# Altium PCB PCB1.PcbDoc (part 1 of 2)
Units mil, origin at the board's own origin, x right, y up, seen from the top; angles counter-clockwise.
Board outline 8251 x 7030 mil, 4 copper layers (Top Layer, Mid-Layer 1, Mid-Layer 2, Bottom Layer); 230 components, 122 nets, 652 pads, 23 vias.
Unrouted connection lines stored in the file: 312.
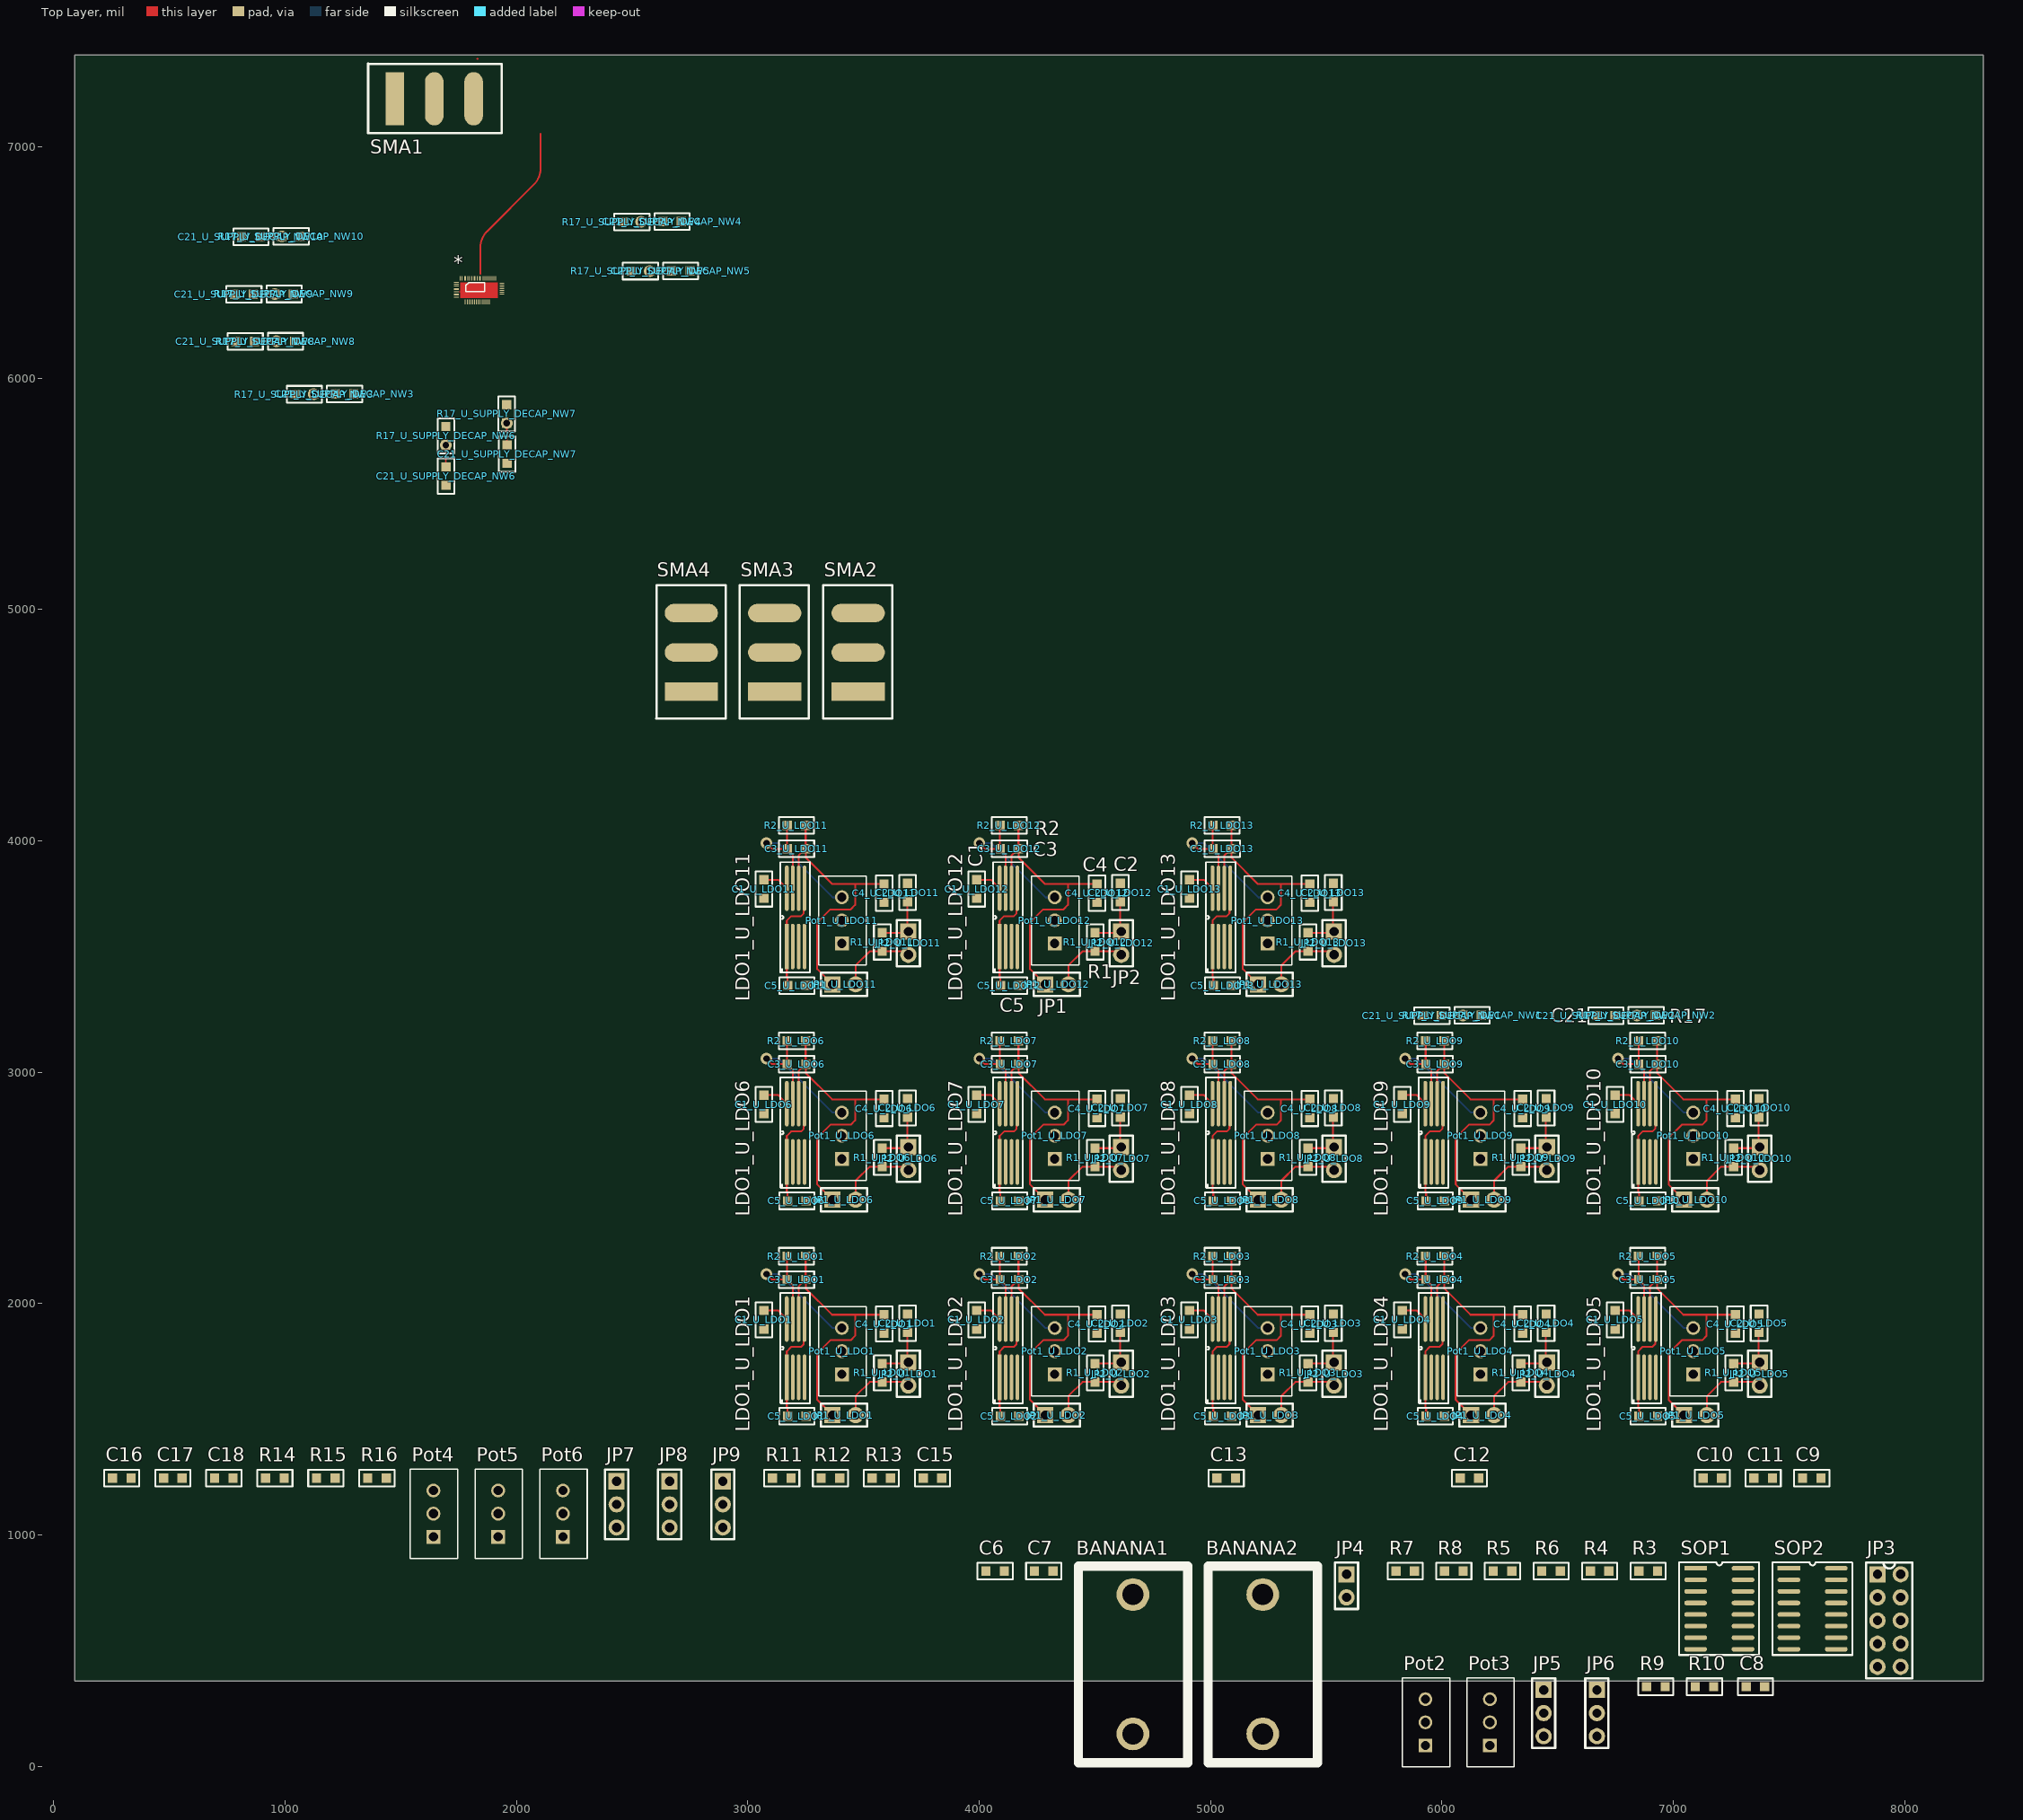
[diagram p0: Top Layer view]
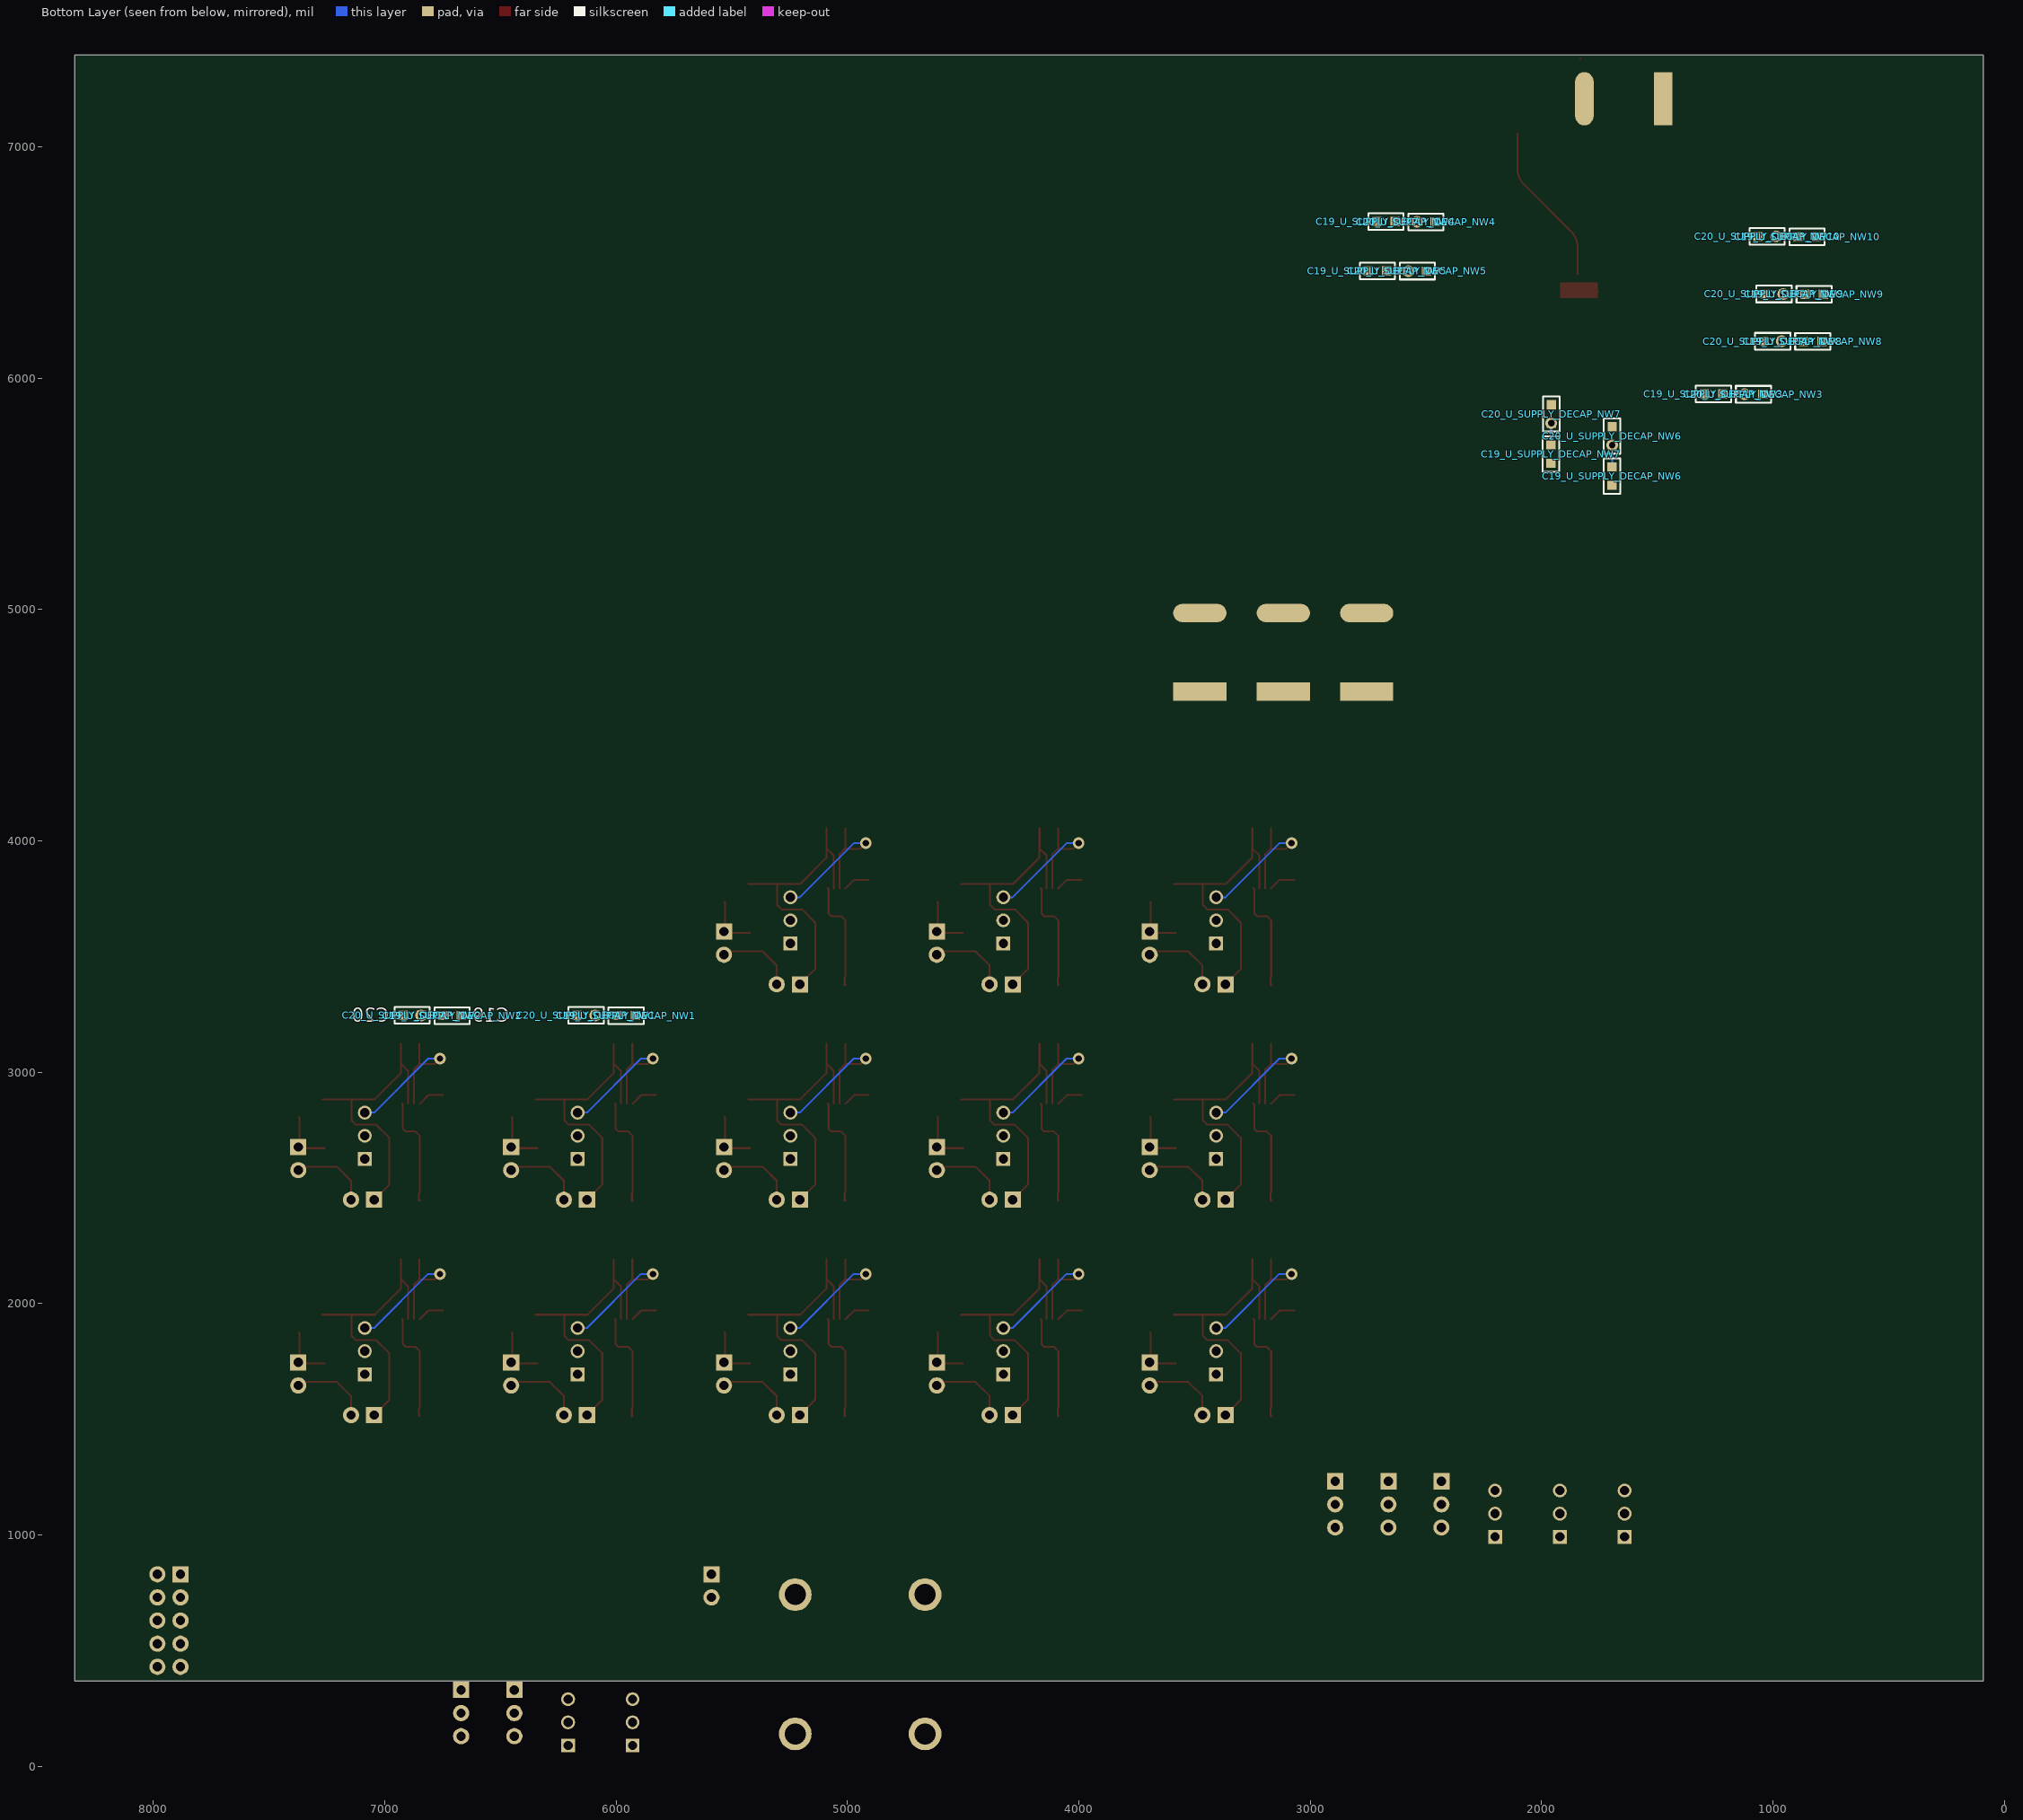
[diagram p1: Bottom Layer view, seen from below]

## Layer stack, top to bottom
Top Solder: solder mask 0.4, Solder Resist, Dk 3.5
Top Layer: signal copper 1.4
Dielectric 1: dielectric 12.6, FR-4, Dk 4.8
Mid-Layer 1: signal copper 1.4
Dielectric2: dielectric 12.6, FR-4, Dk 4.8
Mid-Layer 2: signal copper 1.4
Dielectric3: dielectric 12.6, FR-4, Dk 4.8
Bottom Layer: signal copper 1.4
Bottom Solder: solder mask 0.4, Solder Resist, Dk 3.5

## Board outline
90,368 8341,368 8341,7398 90,7398

## Design rules (kind name [scope] priority, off if disabled: settings)
Clearance "Stitching GND" [IsStitchingVia and InNet('GND') vs (IsVia and (Not IsStitchingVia)) Or IsPad] p1: gap=40
Clearance Clearance_CPWG_single [(InNet('INCLK') OR InNet('PLL_CLK_OUT') OR InNet('PLL_CLK_OUTB')) vs InPolygon] p2: gap=6
Clearance [All] p3: gap=4
DiffPairsRouting [InNet('TXP') OR InNet('TXN')] p1: maxlimit=10 minlimit=10 mostfreqgap=10 toplayer_minwidth=15 toplayer_maxwidth=15 toplayer_prefwidth=15 midlayer1_minwidth=15 midlayer1_maxwidth=15 midlayer1_prefwidth=15 midlayer2_minwidth=15 midlayer2_maxwidth=15 midlayer2_prefwidth=15 bottomlayer_minwidth=15 bottomlayer_maxwidth=15 bottomlayer_prefwidth=15 maxuncoupledlength=500
HoleSize [All] p1: absolutevalues=TRUE maxlimit=250 minlimit=10 maxpercent=80.000 minpercent=20.000
MatchedLengths MatchedLengths_1 [InNet('RXP') OR InNet('RXN')] p1: tolerance=10 checknetsindiffpair=FALSE checkdiffpairvsdiffpair=TRUE checkothers=TRUE
MatchedLengths [InNet('TXP') OR InNet('TXN')] p2: tolerance=1 checknetsindiffpair=FALSE checkdiffpairvsdiffpair=TRUE checkothers=TRUE
PolygonConnect PolygonConnect_GND [All] p1: connectstyle=Direct reliefconductorwidth=10 reliefentries=4 polygonreliefangle="90 Angle" airgapwidth=10
PolygonConnect [All] p2: connectstyle=Relief reliefconductorwidth=10 reliefentries=4 polygonreliefangle="90 Angle" airgapwidth=10
RoomDefinition U_SUPPLY_DECAP_NW10 [InComponentClass('U_SUPPLY_DECAP_NW10')] p1: confinementstyle=ConfineIn formatcopy=TRUE lockcomponents=FALSE outline 575,6550 1327,6550 1327,6681 575,6681
RoomDefinition U_SUPPLY_DECAP_NW9 [InComponentClass('U_SUPPLY_DECAP_NW9')] p2: confinementstyle=ConfineIn formatcopy=TRUE lockcomponents=FALSE outline 545,6301 1297,6301 1297,6432 545,6432
RoomDefinition U_SUPPLY_DECAP_NW8 [InComponentClass('U_SUPPLY_DECAP_NW8')] p3: confinementstyle=ConfineIn formatcopy=TRUE lockcomponents=FALSE outline 551,6097 1303,6097 1303,6228 551,6228
RoomDefinition U_SUPPLY_DECAP_NW7 [InComponentClass('U_SUPPLY_DECAP_NW7')] p4: confinementstyle=ConfineIn formatcopy=TRUE lockcomponents=FALSE outline 2021,5395 2021,6147 1890,6147 1890,5395
RoomDefinition U_SUPPLY_DECAP_NW6 [InComponentClass('U_SUPPLY_DECAP_NW6')] p5: confinementstyle=ConfineIn formatcopy=TRUE lockcomponents=FALSE outline 1758,5300 1758,6052 1627,6052 1627,5300
RoomDefinition U_SUPPLY_DECAP_NW5 [InComponentClass('U_SUPPLY_DECAP_NW5')] p6: confinementstyle=ConfineIn formatcopy=TRUE lockcomponents=FALSE outline 2987,6526 2235,6526 2235,6395 2987,6395
RoomDefinition U_SUPPLY_DECAP_NW4 [InComponentClass('U_SUPPLY_DECAP_NW4')] p7: confinementstyle=ConfineIn formatcopy=TRUE lockcomponents=FALSE outline 2950,6739 2198,6739 2198,6608 2950,6608
RoomDefinition U_SUPPLY_DECAP_NW3 [InComponentClass('U_SUPPLY_DECAP_NW3')] p8: confinementstyle=ConfineIn formatcopy=TRUE lockcomponents=FALSE outline 1534,5994 782,5994 782,5863 1534,5863
RoomDefinition U_SUPPLY_DECAP_NW2 [InComponentClass('U_SUPPLY_DECAP_NW2')] p9: confinementstyle=ConfineIn formatcopy=TRUE lockcomponents=FALSE outline 6432,3183 7184,3183 7184,3314 6432,3314
RoomDefinition U_SUPPLY_DECAP_NW1 [InComponentClass('U_SUPPLY_DECAP_NW1')] p10: confinementstyle=ConfineIn formatcopy=TRUE lockcomponents=FALSE outline 5680,3183 6432,3183 6432,3314 5680,3314
RoomDefinition U_LDO13 [InComponentClass('U_LDO13')] p11: confinementstyle=ConfineIn formatcopy=TRUE lockcomponents=FALSE outline 4760,3183 5680,3183 5680,4114 4760,4114
RoomDefinition U_LDO12 [InComponentClass('U_LDO12')] p12: confinementstyle=ConfineIn formatcopy=TRUE lockcomponents=FALSE outline 3840,3183 4760,3183 4760,4114 3840,4114
RoomDefinition U_LDO11 [InComponentClass('U_LDO11')] p13: confinementstyle=ConfineIn formatcopy=TRUE lockcomponents=FALSE outline 2920,3183 3840,3183 3840,4114 2920,4114
RoomDefinition U_LDO10 [InComponentClass('U_LDO10')] p14: confinementstyle=ConfineIn formatcopy=TRUE lockcomponents=FALSE outline 6600,2252 7520,2252 7520,3183 6600,3183
RoomDefinition U_LDO9 [InComponentClass('U_LDO9')] p15: confinementstyle=ConfineIn formatcopy=TRUE lockcomponents=FALSE outline 5680,2252 6600,2252 6600,3183 5680,3183
RoomDefinition U_LDO8 [InComponentClass('U_LDO8')] p16: confinementstyle=ConfineIn formatcopy=TRUE lockcomponents=FALSE outline 4760,2252 5680,2252 5680,3183 4760,3183
RoomDefinition U_LDO7 [InComponentClass('U_LDO7')] p17: confinementstyle=ConfineIn formatcopy=TRUE lockcomponents=FALSE outline 3840,2252 4760,2252 4760,3183 3840,3183
RoomDefinition U_LDO6 [InComponentClass('U_LDO6')] p18: confinementstyle=ConfineIn formatcopy=TRUE lockcomponents=FALSE outline 2920,2252 3840,2252 3840,3183 2920,3183
RoomDefinition U_LDO5 [InComponentClass('U_LDO5')] p19: confinementstyle=ConfineIn formatcopy=TRUE lockcomponents=FALSE outline 6600,1321 7520,1321 7520,2252 6600,2252
RoomDefinition U_LDO4 [InComponentClass('U_LDO4')] p20: confinementstyle=ConfineIn formatcopy=TRUE lockcomponents=FALSE outline 5680,1321 6600,1321 6600,2252 5680,2252
RoomDefinition U_LDO3 [InComponentClass('U_LDO3')] p21: confinementstyle=ConfineIn formatcopy=TRUE lockcomponents=FALSE outline 4760,1321 5680,1321 5680,2252 4760,2252
RoomDefinition U_LDO2 [InComponentClass('U_LDO2')] p22: confinementstyle=ConfineIn formatcopy=TRUE lockcomponents=FALSE outline 3840,1321 4760,1321 4760,2252 3840,2252
RoomDefinition U_LDO1 [InComponentClass('U_LDO1')] p23: confinementstyle=ConfineIn formatcopy=TRUE lockcomponents=FALSE outline 2920,1321 3840,1321 3840,2252 2920,2252
RoutingVias [All] p1: holewidth=28 width=50 viastyle="Through Hole" minholewidth=10 minwidth=15 maxholewidth=250 maxwidth=250
SolderMaskExpansion "Schematic Solder Mask Expansion_13" [InComponent('Pot3')] p1: expansion=5
SolderMaskExpansion "Schematic Solder Mask Expansion_10" [InComponent('R10')] p2: expansion=5
SolderMaskExpansion "Schematic Solder Mask Expansion_7" [InComponent('SMA1')] p3: expansion=5
SolderMaskExpansion "Schematic Solder Mask Expansion_4" [InComponent('SMA2')] p4: expansion=5
SolderMaskExpansion "Schematic Solder Mask Expansion_1" [InComponent('SMA3')] p5: expansion=5
SolderMaskExpansion "Schematic Solder Mask Expansion" [InComponent('SMA4')] p6: expansion=5
SolderMaskExpansion "Schematic Solder Mask Expansion_307" [InComponent('C1_U_LDO5')] p7: expansion=5
SolderMaskExpansion "Schematic Solder Mask Expansion_306" [InComponent('C1_U_LDO4')] p8: expansion=5
SolderMaskExpansion "Schematic Solder Mask Expansion_305" [InComponent('C1_U_LDO1')] p9: expansion=5
SolderMaskExpansion "Schematic Solder Mask Expansion_304" [InComponent('C1_U_LDO3')] p10: expansion=5
SolderMaskExpansion "Schematic Solder Mask Expansion_303" [InComponent('C1_U_LDO2')] p11: expansion=5
SolderMaskExpansion "Schematic Solder Mask Expansion_302" [InComponent('BANANA2')] p12: expansion=5
SolderMaskExpansion "Schematic Solder Mask Expansion_301" [InComponent('BANANA1')] p13: expansion=5
SolderMaskExpansion "Schematic Solder Mask Expansion_300" [InComponent('C20_U_SUPPLY_DECAP_NW9')] p14: expansion=5
SolderMaskExpansion "Schematic Solder Mask Expansion_299" [InComponent('C1_U_LDO6')] p15: expansion=5
SolderMaskExpansion "Schematic Solder Mask Expansion_298" [InComponent('C1_U_LDO7')] p16: expansion=5
SolderMaskExpansion "Schematic Solder Mask Expansion_297" [InComponent('C1_U_LDO8')] p17: expansion=5
SolderMaskExpansion "Schematic Solder Mask Expansion_296" [InComponent('C1_U_LDO9')] p18: expansion=5
SolderMaskExpansion "Schematic Solder Mask Expansion_295" [InComponent('C1_U_LDO10')] p19: expansion=5
SolderMaskExpansion "Schematic Solder Mask Expansion_294" [InComponent('C1_U_LDO11')] p20: expansion=5
SolderMaskExpansion "Schematic Solder Mask Expansion_293" [InComponent('C4_U_LDO5')] p21: expansion=5
SolderMaskExpansion "Schematic Solder Mask Expansion_292" [InComponent('C1_U_LDO12')] p22: expansion=5
SolderMaskExpansion "Schematic Solder Mask Expansion_291" [InComponent('C1_U_LDO13')] p23: expansion=5
SolderMaskExpansion "Schematic Solder Mask Expansion_290" [InComponent('C2_U_LDO1')] p24: expansion=5
SolderMaskExpansion "Schematic Solder Mask Expansion_289" [InComponent('C2_U_LDO2')] p25: expansion=5
SolderMaskExpansion "Schematic Solder Mask Expansion_288" [InComponent('C2_U_LDO3')] p26: expansion=5
SolderMaskExpansion "Schematic Solder Mask Expansion_287" [InComponent('C2_U_LDO4')] p27: expansion=5
SolderMaskExpansion "Schematic Solder Mask Expansion_286" [InComponent('C2_U_LDO5')] p28: expansion=5
SolderMaskExpansion "Schematic Solder Mask Expansion_285" [InComponent('C2_U_LDO6')] p29: expansion=5
SolderMaskExpansion "Schematic Solder Mask Expansion_284" [InComponent('C2_U_LDO7')] p30: expansion=5
SolderMaskExpansion "Schematic Solder Mask Expansion_283" [InComponent('C2_U_LDO8')] p31: expansion=5
SolderMaskExpansion "Schematic Solder Mask Expansion_282" [InComponent('C2_U_LDO9')] p32: expansion=5
SolderMaskExpansion "Schematic Solder Mask Expansion_281" [InComponent('C2_U_LDO10')] p33: expansion=5
SolderMaskExpansion "Schematic Solder Mask Expansion_280" [InComponent('C2_U_LDO11')] p34: expansion=5
SolderMaskExpansion "Schematic Solder Mask Expansion_279" [InComponent('C2_U_LDO12')] p35: expansion=5
SolderMaskExpansion "Schematic Solder Mask Expansion_278" [InComponent('C2_U_LDO13')] p36: expansion=5
SolderMaskExpansion "Schematic Solder Mask Expansion_277" [InComponent('C3_U_LDO1')] p37: expansion=5
SolderMaskExpansion "Schematic Solder Mask Expansion_276" [InComponent('C3_U_LDO2')] p38: expansion=5
SolderMaskExpansion "Schematic Solder Mask Expansion_275" [InComponent('C3_U_LDO3')] p39: expansion=5
SolderMaskExpansion "Schematic Solder Mask Expansion_274" [InComponent('C3_U_LDO4')] p40: expansion=5
SolderMaskExpansion "Schematic Solder Mask Expansion_273" [InComponent('C3_U_LDO5')] p41: expansion=5
SolderMaskExpansion "Schematic Solder Mask Expansion_272" [InComponent('C3_U_LDO6')] p42: expansion=5
SolderMaskExpansion "Schematic Solder Mask Expansion_271" [InComponent('C3_U_LDO7')] p43: expansion=5
SolderMaskExpansion "Schematic Solder Mask Expansion_270" [InComponent('C3_U_LDO8')] p44: expansion=5
SolderMaskExpansion "Schematic Solder Mask Expansion_269" [InComponent('C3_U_LDO9')] p45: expansion=5
SolderMaskExpansion "Schematic Solder Mask Expansion_268" [InComponent('C3_U_LDO10')] p46: expansion=5
SolderMaskExpansion "Schematic Solder Mask Expansion_267" [InComponent('C3_U_LDO11')] p47: expansion=5
SolderMaskExpansion "Schematic Solder Mask Expansion_266" [InComponent('C3_U_LDO12')] p48: expansion=5
SolderMaskExpansion "Schematic Solder Mask Expansion_265" [InComponent('C3_U_LDO13')] p49: expansion=5
SolderMaskExpansion "Schematic Solder Mask Expansion_264" [InComponent('C4_U_LDO1')] p50: expansion=5
SolderMaskExpansion "Schematic Solder Mask Expansion_263" [InComponent('C4_U_LDO2')] p51: expansion=5
SolderMaskExpansion "Schematic Solder Mask Expansion_262" [InComponent('C4_U_LDO3')] p52: expansion=5
SolderMaskExpansion "Schematic Solder Mask Expansion_261" [InComponent('C4_U_LDO4')] p53: expansion=5
SolderMaskExpansion "Schematic Solder Mask Expansion_260" [InComponent('C4_U_LDO6')] p54: expansion=5
SolderMaskExpansion "Schematic Solder Mask Expansion_259" [InComponent('C4_U_LDO7')] p55: expansion=5
SolderMaskExpansion "Schematic Solder Mask Expansion_258" [InComponent('C4_U_LDO8')] p56: expansion=5
SolderMaskExpansion "Schematic Solder Mask Expansion_257" [InComponent('C4_U_LDO9')] p57: expansion=5
SolderMaskExpansion "Schematic Solder Mask Expansion_256" [InComponent('C4_U_LDO10')] p58: expansion=5
SolderMaskExpansion "Schematic Solder Mask Expansion_255" [InComponent('C4_U_LDO11')] p59: expansion=5
SolderMaskExpansion "Schematic Solder Mask Expansion_254" [InComponent('C4_U_LDO12')] p60: expansion=5
SolderMaskExpansion "Schematic Solder Mask Expansion_253" [InComponent('C4_U_LDO13')] p61: expansion=5
SolderMaskExpansion "Schematic Solder Mask Expansion_252" [InComponent('C5_U_LDO1')] p62: expansion=5
SolderMaskExpansion "Schematic Solder Mask Expansion_251" [InComponent('C5_U_LDO2')] p63: expansion=5
SolderMaskExpansion "Schematic Solder Mask Expansion_250" [InComponent('C5_U_LDO3')] p64: expansion=5
SolderMaskExpansion "Schematic Solder Mask Expansion_249" [InComponent('C5_U_LDO4')] p65: expansion=5
SolderMaskExpansion "Schematic Solder Mask Expansion_248" [InComponent('C5_U_LDO5')] p66: expansion=5
SolderMaskExpansion "Schematic Solder Mask Expansion_247" [InComponent('C5_U_LDO6')] p67: expansion=5
SolderMaskExpansion "Schematic Solder Mask Expansion_246" [InComponent('C5_U_LDO7')] p68: expansion=5
SolderMaskExpansion "Schematic Solder Mask Expansion_245" [InComponent('C5_U_LDO8')] p69: expansion=5
SolderMaskExpansion "Schematic Solder Mask Expansion_244" [InComponent('C5_U_LDO9')] p70: expansion=5
SolderMaskExpansion "Schematic Solder Mask Expansion_243" [InComponent('C5_U_LDO10')] p71: expansion=5
SolderMaskExpansion "Schematic Solder Mask Expansion_242" [InComponent('C5_U_LDO11')] p72: expansion=5
SolderMaskExpansion "Schematic Solder Mask Expansion_241" [InComponent('C5_U_LDO12')] p73: expansion=5
SolderMaskExpansion "Schematic Solder Mask Expansion_240" [InComponent('C5_U_LDO13')] p74: expansion=5
SolderMaskExpansion "Schematic Solder Mask Expansion_239" [InComponent('C6')] p75: expansion=5
SolderMaskExpansion "Schematic Solder Mask Expansion_238" [InComponent('C7')] p76: expansion=5
SolderMaskExpansion "Schematic Solder Mask Expansion_237" [InComponent('C8')] p77: expansion=5
SolderMaskExpansion "Schematic Solder Mask Expansion_236" [InComponent('C9')] p78: expansion=5
SolderMaskExpansion "Schematic Solder Mask Expansion_235" [InComponent('C10')] p79: expansion=5
SolderMaskExpansion "Schematic Solder Mask Expansion_234" [InComponent('C11')] p80: expansion=5
SolderMaskExpansion "Schematic Solder Mask Expansion_233" [InComponent('C12')] p81: expansion=5
SolderMaskExpansion "Schematic Solder Mask Expansion_232" [InComponent('C13')] p82: expansion=5
SolderMaskExpansion "Schematic Solder Mask Expansion_230" [InComponent('C15')] p83: expansion=5
SolderMaskExpansion "Schematic Solder Mask Expansion_229" [InComponent('C16')] p84: expansion=5
SolderMaskExpansion "Schematic Solder Mask Expansion_228" [InComponent('C17')] p85: expansion=5
SolderMaskExpansion "Schematic Solder Mask Expansion_227" [InComponent('C18')] p86: expansion=5
SolderMaskExpansion "Schematic Solder Mask Expansion_226" [InComponent('C19_U_SUPPLY_DECAP_NW1')] p87: expansion=5
SolderMaskExpansion "Schematic Solder Mask Expansion_225" [InComponent('C19_U_SUPPLY_DECAP_NW2')] p88: expansion=5
SolderMaskExpansion "Schematic Solder Mask Expansion_224" [InComponent('C19_U_SUPPLY_DECAP_NW3')] p89: expansion=5
SolderMaskExpansion "Schematic Solder Mask Expansion_223" [InComponent('C19_U_SUPPLY_DECAP_NW4')] p90: expansion=5
SolderMaskExpansion "Schematic Solder Mask Expansion_222" [InComponent('C19_U_SUPPLY_DECAP_NW5')] p91: expansion=5
SolderMaskExpansion "Schematic Solder Mask Expansion_221" [InComponent('C19_U_SUPPLY_DECAP_NW6')] p92: expansion=5
SolderMaskExpansion "Schematic Solder Mask Expansion_220" [InComponent('C19_U_SUPPLY_DECAP_NW7')] p93: expansion=5
SolderMaskExpansion "Schematic Solder Mask Expansion_219" [InComponent('C19_U_SUPPLY_DECAP_NW8')] p94: expansion=5
SolderMaskExpansion "Schematic Solder Mask Expansion_218" [InComponent('C19_U_SUPPLY_DECAP_NW9')] p95: expansion=5
SolderMaskExpansion "Schematic Solder Mask Expansion_217" [InComponent('C19_U_SUPPLY_DECAP_NW10')] p96: expansion=5
SolderMaskExpansion "Schematic Solder Mask Expansion_216" [InComponent('C20_U_SUPPLY_DECAP_NW1')] p97: expansion=5
SolderMaskExpansion "Schematic Solder Mask Expansion_215" [InComponent('C20_U_SUPPLY_DECAP_NW2')] p98: expansion=5
SolderMaskExpansion "Schematic Solder Mask Expansion_214" [InComponent('C20_U_SUPPLY_DECAP_NW3')] p99: expansion=5
SolderMaskExpansion "Schematic Solder Mask Expansion_213" [InComponent('C20_U_SUPPLY_DECAP_NW4')] p100: expansion=5
SolderMaskExpansion "Schematic Solder Mask Expansion_212" [InComponent('C20_U_SUPPLY_DECAP_NW5')] p101: expansion=5
SolderMaskExpansion "Schematic Solder Mask Expansion_211" [InComponent('C20_U_SUPPLY_DECAP_NW6')] p102: expansion=5
SolderMaskExpansion "Schematic Solder Mask Expansion_210" [InComponent('C20_U_SUPPLY_DECAP_NW7')] p103: expansion=5
SolderMaskExpansion "Schematic Solder Mask Expansion_209" [InComponent('C20_U_SUPPLY_DECAP_NW8')] p104: expansion=5
SolderMaskExpansion "Schematic Solder Mask Expansion_208" [InComponent('C20_U_SUPPLY_DECAP_NW10')] p105: expansion=5
SolderMaskExpansion "Schematic Solder Mask Expansion_207" [InComponent('C21_U_SUPPLY_DECAP_NW1')] p106: expansion=5
SolderMaskExpansion "Schematic Solder Mask Expansion_206" [InComponent('C21_U_SUPPLY_DECAP_NW2')] p107: expansion=5
SolderMaskExpansion "Schematic Solder Mask Expansion_205" [InComponent('C21_U_SUPPLY_DECAP_NW3')] p108: expansion=5
SolderMaskExpansion "Schematic Solder Mask Expansion_204" [InComponent('C21_U_SUPPLY_DECAP_NW4')] p109: expansion=5
SolderMaskExpansion "Schematic Solder Mask Expansion_203" [InComponent('C21_U_SUPPLY_DECAP_NW5')] p110: expansion=5
SolderMaskExpansion "Schematic Solder Mask Expansion_202" [InComponent('C21_U_SUPPLY_DECAP_NW6')] p111: expansion=5
SolderMaskExpansion "Schematic Solder Mask Expansion_201" [InComponent('C21_U_SUPPLY_DECAP_NW7')] p112: expansion=5
SolderMaskExpansion "Schematic Solder Mask Expansion_200" [InComponent('C21_U_SUPPLY_DECAP_NW8')] p113: expansion=5
SolderMaskExpansion "Schematic Solder Mask Expansion_199" [InComponent('C21_U_SUPPLY_DECAP_NW9')] p114: expansion=5
SolderMaskExpansion "Schematic Solder Mask Expansion_198" [InComponent('C21_U_SUPPLY_DECAP_NW10')] p115: expansion=5
SolderMaskExpansion "Schematic Solder Mask Expansion_197" [InComponent('JP1_U_LDO1')] p116: expansion=5
SolderMaskExpansion "Schematic Solder Mask Expansion_196" [InComponent('JP1_U_LDO2')] p117: expansion=5
SolderMaskExpansion "Schematic Solder Mask Expansion_195" [InComponent('JP1_U_LDO3')] p118: expansion=5
SolderMaskExpansion "Schematic Solder Mask Expansion_194" [InComponent('JP1_U_LDO4')] p119: expansion=5
SolderMaskExpansion "Schematic Solder Mask Expansion_193" [InComponent('JP1_U_LDO5')] p120: expansion=5
SolderMaskExpansion "Schematic Solder Mask Expansion_192" [InComponent('JP1_U_LDO6')] p121: expansion=5
SolderMaskExpansion "Schematic Solder Mask Expansion_191" [InComponent('JP1_U_LDO7')] p122: expansion=5
SolderMaskExpansion "Schematic Solder Mask Expansion_190" [InComponent('JP1_U_LDO8')] p123: expansion=5
SolderMaskExpansion "Schematic Solder Mask Expansion_189" [InComponent('JP1_U_LDO9')] p124: expansion=5
SolderMaskExpansion "Schematic Solder Mask Expansion_188" [InComponent('JP1_U_LDO10')] p125: expansion=5
SolderMaskExpansion "Schematic Solder Mask Expansion_187" [InComponent('JP1_U_LDO11')] p126: expansion=5
SolderMaskExpansion "Schematic Solder Mask Expansion_186" [InComponent('JP1_U_LDO12')] p127: expansion=5
SolderMaskExpansion "Schematic Solder Mask Expansion_185" [InComponent('JP1_U_LDO13')] p128: expansion=5
SolderMaskExpansion "Schematic Solder Mask Expansion_184" [InComponent('JP2_U_LDO1')] p129: expansion=5
SolderMaskExpansion "Schematic Solder Mask Expansion_183" [InComponent('JP2_U_LDO2')] p130: expansion=5
SolderMaskExpansion "Schematic Solder Mask Expansion_182" [InComponent('JP2_U_LDO3')] p131: expansion=5
SolderMaskExpansion "Schematic Solder Mask Expansion_181" [InComponent('JP2_U_LDO4')] p132: expansion=5
SolderMaskExpansion "Schematic Solder Mask Expansion_180" [InComponent('JP2_U_LDO5')] p133: expansion=5
SolderMaskExpansion "Schematic Solder Mask Expansion_179" [InComponent('JP2_U_LDO6')] p134: expansion=5
SolderMaskExpansion "Schematic Solder Mask Expansion_178" [InComponent('JP2_U_LDO7')] p135: expansion=5
SolderMaskExpansion "Schematic Solder Mask Expansion_177" [InComponent('JP2_U_LDO8')] p136: expansion=5
SolderMaskExpansion "Schematic Solder Mask Expansion_176" [InComponent('JP2_U_LDO9')] p137: expansion=5
SolderMaskExpansion "Schematic Solder Mask Expansion_175" [InComponent('JP2_U_LDO10')] p138: expansion=5
SolderMaskExpansion "Schematic Solder Mask Expansion_174" [InComponent('JP2_U_LDO11')] p139: expansion=5
SolderMaskExpansion "Schematic Solder Mask Expansion_173" [InComponent('JP2_U_LDO12')] p140: expansion=5
SolderMaskExpansion "Schematic Solder Mask Expansion_172" [InComponent('JP2_U_LDO13')] p141: expansion=5
SolderMaskExpansion "Schematic Solder Mask Expansion_171" [InComponent('JP3')] p142: expansion=5
SolderMaskExpansion "Schematic Solder Mask Expansion_170" [InComponent('JP4')] p143: expansion=5
SolderMaskExpansion "Schematic Solder Mask Expansion_169" [InComponent('JP5')] p144: expansion=5
SolderMaskExpansion "Schematic Solder Mask Expansion_168" [InComponent('JP6')] p145: expansion=5
SolderMaskExpansion "Schematic Solder Mask Expansion_167" [InComponent('JP7')] p146: expansion=5
SolderMaskExpansion "Schematic Solder Mask Expansion_166" [InComponent('JP8')] p147: expansion=5
SolderMaskExpansion "Schematic Solder Mask Expansion_165" [InComponent('JP9')] p148: expansion=5
SolderMaskExpansion "Schematic Solder Mask Expansion_164" [InComponent('LDO1_U_LDO1')] p149: expansion=5
SolderMaskExpansion "Schematic Solder Mask Expansion_163" [InComponent('LDO1_U_LDO2')] p150: expansion=5
SolderMaskExpansion "Schematic Solder Mask Expansion_162" [InComponent('LDO1_U_LDO3')] p151: expansion=5
SolderMaskExpansion "Schematic Solder Mask Expansion_161" [InComponent('LDO1_U_LDO4')] p152: expansion=5
SolderMaskExpansion "Schematic Solder Mask Expansion_160" [InComponent('LDO1_U_LDO5')] p153: expansion=5
SolderMaskExpansion "Schematic Solder Mask Expansion_159" [InComponent('LDO1_U_LDO6')] p154: expansion=5
SolderMaskExpansion "Schematic Solder Mask Expansion_158" [InComponent('LDO1_U_LDO7')] p155: expansion=5
SolderMaskExpansion "Schematic Solder Mask Expansion_157" [InComponent('LDO1_U_LDO8')] p156: expansion=5
SolderMaskExpansion "Schematic Solder Mask Expansion_156" [InComponent('LDO1_U_LDO9')] p157: expansion=5
SolderMaskExpansion "Schematic Solder Mask Expansion_155" [InComponent('LDO1_U_LDO10')] p158: expansion=5
SolderMaskExpansion "Schematic Solder Mask Expansion_154" [InComponent('LDO1_U_LDO11')] p159: expansion=5
SolderMaskExpansion "Schematic Solder Mask Expansion_153" [InComponent('LDO1_U_LDO12')] p160: expansion=5
SolderMaskExpansion "Schematic Solder Mask Expansion_152" [InComponent('LDO1_U_LDO13')] p161: expansion=5
SolderMaskExpansion "Schematic Solder Mask Expansion_151" [InComponent('Pot1_U_LDO1')] p162: expansion=5
SolderMaskExpansion "Schematic Solder Mask Expansion_150" [InComponent('Pot1_U_LDO2')] p163: expansion=5
SolderMaskExpansion "Schematic Solder Mask Expansion_149" [InComponent('Pot1_U_LDO3')] p164: expansion=5
SolderMaskExpansion "Schematic Solder Mask Expansion_148" [InComponent('Pot1_U_LDO4')] p165: expansion=5
SolderMaskExpansion "Schematic Solder Mask Expansion_147" [InComponent('Pot1_U_LDO5')] p166: expansion=5
SolderMaskExpansion "Schematic Solder Mask Expansion_146" [InComponent('Pot1_U_LDO6')] p167: expansion=5
SolderMaskExpansion "Schematic Solder Mask Expansion_145" [InComponent('Pot1_U_LDO7')] p168: expansion=5
SolderMaskExpansion "Schematic Solder Mask Expansion_144" [InComponent('Pot1_U_LDO8')] p169: expansion=5
SolderMaskExpansion "Schematic Solder Mask Expansion_143" [InComponent('Pot1_U_LDO9')] p170: expansion=5
SolderMaskExpansion "Schematic Solder Mask Expansion_142" [InComponent('Pot1_U_LDO10')] p171: expansion=5
SolderMaskExpansion "Schematic Solder Mask Expansion_141" [InComponent('Pot1_U_LDO11')] p172: expansion=5
SolderMaskExpansion "Schematic Solder Mask Expansion_140" [InComponent('Pot1_U_LDO12')] p173: expansion=5
SolderMaskExpansion "Schematic Solder Mask Expansion_139" [InComponent('Pot1_U_LDO13')] p174: expansion=5
SolderMaskExpansion "Schematic Solder Mask Expansion_138" [InComponent('Pot2')] p175: expansion=5
SolderMaskExpansion "Schematic Solder Mask Expansion_136" [InComponent('Pot4')] p176: expansion=5
SolderMaskExpansion "Schematic Solder Mask Expansion_135" [InComponent('Pot5')] p177: expansion=5
SolderMaskExpansion "Schematic Solder Mask Expansion_134" [InComponent('Pot6')] p178: expansion=5
SolderMaskExpansion "Schematic Solder Mask Expansion_133" [InComponent('R1_U_LDO1')] p179: expansion=5
SolderMaskExpansion "Schematic Solder Mask Expansion_132" [InComponent('R1_U_LDO2')] p180: expansion=5
SolderMaskExpansion "Schematic Solder Mask Expansion_131" [InComponent('R1_U_LDO3')] p181: expansion=5
SolderMaskExpansion "Schematic Solder Mask Expansion_130" [InComponent('R1_U_LDO4')] p182: expansion=5
SolderMaskExpansion "Schematic Solder Mask Expansion_125" [InComponent('R1_U_LDO5')] p183: expansion=5
SolderMaskExpansion "Schematic Solder Mask Expansion_120" [InComponent('R1_U_LDO6')] p184: expansion=5
SolderMaskExpansion "Schematic Solder Mask Expansion_115" [InComponent('R1_U_LDO7')] p185: expansion=5
SolderMaskExpansion "Schematic Solder Mask Expansion_110" [InComponent('R1_U_LDO8')] p186: expansion=5
SolderMaskExpansion "Schematic Solder Mask Expansion_105" [InComponent('R1_U_LDO9')] p187: expansion=5
SolderMaskExpansion "Schematic Solder Mask Expansion_103" [InComponent('R1_U_LDO10')] p188: expansion=5
SolderMaskExpansion "Schematic Solder Mask Expansion_100" [InComponent('R1_U_LDO11')] p189: expansion=5
SolderMaskExpansion "Schematic Solder Mask Expansion_97" [InComponent('R1_U_LDO12')] p190: expansion=5
SolderMaskExpansion "Schematic Solder Mask Expansion_94" [InComponent('R1_U_LDO13')] p191: expansion=5
SolderMaskExpansion "Schematic Solder Mask Expansion_91" [InComponent('R2_U_LDO1')] p192: expansion=5
SolderMaskExpansion "Schematic Solder Mask Expansion_88" [InComponent('R2_U_LDO2')] p193: expansion=5
SolderMaskExpansion "Schematic Solder Mask Expansion_87" [InComponent('R2_U_LDO3')] p194: expansion=5
SolderMaskExpansion "Schematic Solder Mask Expansion_86" [InComponent('R2_U_LDO4')] p195: expansion=5
SolderMaskExpansion "Schematic Solder Mask Expansion_85" [InComponent('R2_U_LDO5')] p196: expansion=5
SolderMaskExpansion "Schematic Solder Mask Expansion_84" [InComponent('R2_U_LDO6')] p197: expansion=5
SolderMaskExpansion "Schematic Solder Mask Expansion_79" [InComponent('R2_U_LDO7')] p198: expansion=5
SolderMaskExpansion "Schematic Solder Mask Expansion_74" [InComponent('R2_U_LDO8')] p199: expansion=5
SolderMaskExpansion "Schematic Solder Mask Expansion_71" [InComponent('R2_U_LDO9')] p200: expansion=5
SolderMaskExpansion "Schematic Solder Mask Expansion_68" [InComponent('R2_U_LDO10')] p201: expansion=5
SolderMaskExpansion "Schematic Solder Mask Expansion_65" [InComponent('R2_U_LDO11')] p202: expansion=5
SolderMaskExpansion "Schematic Solder Mask Expansion_62" [InComponent('R2_U_LDO12')] p203: expansion=5
SolderMaskExpansion "Schematic Solder Mask Expansion_57" [InComponent('R2_U_LDO13')] p204: expansion=5
SolderMaskExpansion "Schematic Solder Mask Expansion_54" [InComponent('R3')] p205: expansion=5
SolderMaskExpansion "Schematic Solder Mask Expansion_49" [InComponent('R4')] p206: expansion=5
SolderMaskExpansion "Schematic Solder Mask Expansion_46" [InComponent('R5')] p207: expansion=5
SolderMaskExpansion "Schematic Solder Mask Expansion_45" [InComponent('R6')] p208: expansion=5
SolderMaskExpansion "Schematic Solder Mask Expansion_44" [InComponent('R7')] p209: expansion=5
SolderMaskExpansion "Schematic Solder Mask Expansion_43" [InComponent('R8')] p210: expansion=5
SolderMaskExpansion "Schematic Solder Mask Expansion_42" [InComponent('R9')] p211: expansion=5
SolderMaskExpansion "Schematic Solder Mask Expansion_40" [InComponent('R11')] p212: expansion=5
SolderMaskExpansion "Schematic Solder Mask Expansion_39" [InComponent('R12')] p213: expansion=5
SolderMaskExpansion "Schematic Solder Mask Expansion_38" [InComponent('R13')] p214: expansion=5
SolderMaskExpansion "Schematic Solder Mask Expansion_37" [InComponent('R14')] p215: expansion=5
SolderMaskExpansion "Schematic Solder Mask Expansion_36" [InComponent('R15')] p216: expansion=5
SolderMaskExpansion "Schematic Solder Mask Expansion_35" [InComponent('R16')] p217: expansion=5
SolderMaskExpansion "Schematic Solder Mask Expansion_34" [InComponent('R17_U_SUPPLY_DECAP_NW1')] p218: expansion=5
SolderMaskExpansion "Schematic Solder Mask Expansion_33" [InComponent('R17_U_SUPPLY_DECAP_NW2')] p219: expansion=5
SolderMaskExpansion "Schematic Solder Mask Expansion_32" [InComponent('R17_U_SUPPLY_DECAP_NW3')] p220: expansion=5
SolderMaskExpansion "Schematic Solder Mask Expansion_31" [InComponent('R17_U_SUPPLY_DECAP_NW4')] p221: expansion=5
SolderMaskExpansion "Schematic Solder Mask Expansion_30" [InComponent('R17_U_SUPPLY_DECAP_NW5')] p222: expansion=5
SolderMaskExpansion "Schematic Solder Mask Expansion_25" [InComponent('R17_U_SUPPLY_DECAP_NW6')] p223: expansion=5
SolderMaskExpansion "Schematic Solder Mask Expansion_20" [InComponent('R17_U_SUPPLY_DECAP_NW7')] p224: expansion=5
SolderMaskExpansion "Schematic Solder Mask Expansion_15" [InComponent('R17_U_SUPPLY_DECAP_NW8')] p225: expansion=5
SolderMaskExpansion "Schematic Solder Mask Expansion_12" [InComponent('R17_U_SUPPLY_DECAP_NW9')] p226: expansion=5
SolderMaskExpansion "Schematic Solder Mask Expansion_9" [InComponent('R17_U_SUPPLY_DECAP_NW10')] p227: expansion=5
SolderMaskExpansion "Schematic Solder Mask Expansion_6" [InComponent('SOP1')] p228: expansion=5
SolderMaskExpansion "Schematic Solder Mask Expansion_3" [InComponent('SOP2')] p229: expansion=5
SolderMaskExpansion "Schematic Solder Mask Expansion_129" [InComponent('CL1_LDO2')] p230: expansion=5
SolderMaskExpansion "Schematic Solder Mask Expansion_128" [InComponent('CL1_LDO3')] p231: expansion=5
SolderMaskExpansion "Schematic Solder Mask Expansion_127" [InComponent('CL1_LDO4')] p232: expansion=5
SolderMaskExpansion "Schematic Solder Mask Expansion_124" [InComponent('CL2_LDO2')] p233: expansion=5
SolderMaskExpansion "Schematic Solder Mask Expansion_123" [InComponent('CL2_LDO3')] p234: expansion=5
SolderMaskExpansion "Schematic Solder Mask Expansion_122" [InComponent('CL2_LDO4')] p235: expansion=5
SolderMaskExpansion "Schematic Solder Mask Expansion_119" [InComponent('CL3_LDO2')] p236: expansion=5
SolderMaskExpansion "Schematic Solder Mask Expansion_118" [InComponent('CL3_LDO3')] p237: expansion=5
SolderMaskExpansion "Schematic Solder Mask Expansion_117" [InComponent('CL3_LDO4')] p238: expansion=5
SolderMaskExpansion "Schematic Solder Mask Expansion_114" [InComponent('CL4_LDO2')] p239: expansion=5
SolderMaskExpansion "Schematic Solder Mask Expansion_113" [InComponent('CL4_LDO3')] p240: expansion=5
SolderMaskExpansion "Schematic Solder Mask Expansion_112" [InComponent('CL4_LDO4')] p241: expansion=5
SolderMaskExpansion "Schematic Solder Mask Expansion_109" [InComponent('CL5_LDO2')] p242: expansion=5
SolderMaskExpansion "Schematic Solder Mask Expansion_108" [InComponent('CL5_LDO3')] p243: expansion=5
SolderMaskExpansion "Schematic Solder Mask Expansion_107" [InComponent('CL5_LDO4')] p244: expansion=5
SolderMaskExpansion "Schematic Solder Mask Expansion_104" [InComponent('CS1_SHLDO3')] p245: expansion=5
SolderMaskExpansion "Schematic Solder Mask Expansion_102" [InComponent('CS2_SHLDO2')] p246: expansion=5
SolderMaskExpansion "Schematic Solder Mask Expansion_99" [InComponent('CS3_SHLDO2')] p247: expansion=5
SolderMaskExpansion "Schematic Solder Mask Expansion_96" [InComponent('CS4_SHLDO2')] p248: expansion=5
SolderMaskExpansion "Schematic Solder Mask Expansion_93" [InComponent('CS5_SHLDO2')] p249: expansion=5
SolderMaskExpansion "Schematic Solder Mask Expansion_90" [InComponent('CS6_SHLDO2')] p250: expansion=5
SolderMaskExpansion "Schematic Solder Mask Expansion_83" [InComponent('JPL1_LDO2')] p251: expansion=5
SolderMaskExpansion "Schematic Solder Mask Expansion_82" [InComponent('JPL1_LDO3')] p252: expansion=5
SolderMaskExpansion "Schematic Solder Mask Expansion_81" [InComponent('JPL1_LDO4')] p253: expansion=5
SolderMaskExpansion "Schematic Solder Mask Expansion_78" [InComponent('JPL2_LDO2')] p254: expansion=5
SolderMaskExpansion "Schematic Solder Mask Expansion_77" [InComponent('JPL2_LDO3')] p255: expansion=5
SolderMaskExpansion "Schematic Solder Mask Expansion_76" [InComponent('JPL2_LDO4')] p256: expansion=5
SolderMaskExpansion "Schematic Solder Mask Expansion_73" [InComponent('JPS1_SHLDO2')] p257: expansion=5
SolderMaskExpansion "Schematic Solder Mask Expansion_70" [InComponent('JPS2_SHLDO2')] p258: expansion=5
SolderMaskExpansion "Schematic Solder Mask Expansion_67" [InComponent('JPS3_SHLDO2')] p259: expansion=5
SolderMaskExpansion "Schematic Solder Mask Expansion_64" [InComponent('JPS4_SHLDO2')] p260: expansion=5
SolderMaskExpansion "Schematic Solder Mask Expansion_61" [InComponent('LDOL1_LDO2')] p261: expansion=5
SolderMaskExpansion "Schematic Solder Mask Expansion_60" [InComponent('LDOL1_LDO3')] p262: expansion=5
SolderMaskExpansion "Schematic Solder Mask Expansion_59" [InComponent('LDOL1_LDO4')] p263: expansion=5
SolderMaskExpansion "Schematic Solder Mask Expansion_56" [InComponent('LDOS1_SHLDO2')] p264: expansion=5
SolderMaskExpansion "Schematic Solder Mask Expansion_53" [InComponent('PotL1_LDO2')] p265: expansion=5
SolderMaskExpansion "Schematic Solder Mask Expansion_52" [InComponent('PotL1_LDO3')] p266: expansion=5
SolderMaskExpansion "Schematic Solder Mask Expansion_51" [InComponent('PotL1_LDO4')] p267: expansion=5
SolderMaskExpansion "Schematic Solder Mask Expansion_48" [InComponent('PotS1_SHLDO2')] p268: expansion=5
SolderMaskExpansion "Schematic Solder Mask Expansion_29" [InComponent('RL1_LDO2')] p269: expansion=5
SolderMaskExpansion "Schematic Solder Mask Expansion_28" [InComponent('RL1_LDO3')] p270: expansion=5
SolderMaskExpansion "Schematic Solder Mask Expansion_27" [InComponent('RL1_LDO4')] p271: expansion=5
SolderMaskExpansion "Schematic Solder Mask Expansion_24" [InComponent('RL2_LDO2')] p272: expansion=5
SolderMaskExpansion "Schematic Solder Mask Expansion_23" [InComponent('RL2_LDO3')] p273: expansion=5
SolderMaskExpansion "Schematic Solder Mask Expansion_22" [InComponent('RL2_LDO4')] p274: expansion=5
SolderMaskExpansion "Schematic Solder Mask Expansion_19" [InComponent('RL3_LDO2')] p275: expansion=5
SolderMaskExpansion "Schematic Solder Mask Expansion_18" [InComponent('RL3_LDO3')] p276: expansion=5
SolderMaskExpansion "Schematic Solder Mask Expansion_17" [InComponent('RL3_LDO4')] p277: expansion=5
SolderMaskExpansion "Schematic Solder Mask Expansion_14" [InComponent('RS1_SHLDO2')] p278: expansion=5
SolderMaskExpansion "Schematic Solder Mask Expansion_11" [InComponent('RS2_SHLDO2')] p279: expansion=5
SolderMaskExpansion "Schematic Solder Mask Expansion_8" [InComponent('RS6_SHLDO2')] p280: expansion=5
SolderMaskExpansion "Schematic Solder Mask Expansion_5" [InComponent('RS7_SHLDO2')] p281: expansion=5
SolderMaskExpansion "Schematic Solder Mask Expansion_2" [InComponent('RS8_SHLDO2')] p282: expansion=5
SolderMaskExpansion [All] p283: expansion=5
UnpouredPolygon [All] p1: allowunpoured=FALSE
Width Width_HS_Signal [InNet('INCLK') OR InNet('PLL_CLK_OUT') OR InNet('PLL_CLK_OUTB')] p1: maxlimit=8 minlimit=8 preferedwidth=8
Width [All] p2: maxlimit=60 minlimit=4 preferedwidth=30
27 further rules are at their usual default settings.

## Classes and differential pairs
channel class LDO: U_LDO1 U_LDO2 U_LDO3 U_LDO4 U_LDO5 U_LDO6 U_LDO7 U_LDO8 U_LDO9 U_LDO10 U_LDO11 U_LDO12 U_LDO13
component class U_LDO13: C1_U_LDO13 C2_U_LDO13 C3_U_LDO13 C4_U_LDO13 C5_U_LDO13 JP1_U_LDO13 JP2_U_LDO13 LDO1_U_LDO13 Pot1_U_LDO13 R1_U_LDO13 R2_U_LDO13
component class U_LDO12: C1_U_LDO12 C2_U_LDO12 C3_U_LDO12 C4_U_LDO12 C5_U_LDO12 JP1_U_LDO12 JP2_U_LDO12 LDO1_U_LDO12 Pot1_U_LDO12 R1_U_LDO12 R2_U_LDO12
component class U_LDO11: C1_U_LDO11 C2_U_LDO11 C3_U_LDO11 C4_U_LDO11 C5_U_LDO11 JP1_U_LDO11 JP2_U_LDO11 LDO1_U_LDO11 Pot1_U_LDO11 R1_U_LDO11 R2_U_LDO11
component class U_LDO10: C1_U_LDO10 C2_U_LDO10 C3_U_LDO10 C4_U_LDO10 C5_U_LDO10 JP1_U_LDO10 JP2_U_LDO10 LDO1_U_LDO10 Pot1_U_LDO10 R1_U_LDO10 R2_U_LDO10
component class U_LDO9: C1_U_LDO9 C2_U_LDO9 C3_U_LDO9 C4_U_LDO9 C5_U_LDO9 JP1_U_LDO9 JP2_U_LDO9 LDO1_U_LDO9 Pot1_U_LDO9 R1_U_LDO9 R2_U_LDO9
component class U_LDO8: C1_U_LDO8 C2_U_LDO8 C3_U_LDO8 C4_U_LDO8 C5_U_LDO8 JP1_U_LDO8 JP2_U_LDO8 LDO1_U_LDO8 Pot1_U_LDO8 R1_U_LDO8 R2_U_LDO8
component class U_LDO7: C1_U_LDO7 C2_U_LDO7 C3_U_LDO7 C4_U_LDO7 C5_U_LDO7 JP1_U_LDO7 JP2_U_LDO7 LDO1_U_LDO7 Pot1_U_LDO7 R1_U_LDO7 R2_U_LDO7
component class U_LDO6: C1_U_LDO6 C2_U_LDO6 C3_U_LDO6 C4_U_LDO6 C5_U_LDO6 JP1_U_LDO6 JP2_U_LDO6 LDO1_U_LDO6 Pot1_U_LDO6 R1_U_LDO6 R2_U_LDO6
component class U_LDO5: C1_U_LDO5 C2_U_LDO5 C3_U_LDO5 C4_U_LDO5 C5_U_LDO5 JP1_U_LDO5 JP2_U_LDO5 LDO1_U_LDO5 Pot1_U_LDO5 R1_U_LDO5 R2_U_LDO5
component class U_LDO4: C1_U_LDO4 C2_U_LDO4 C3_U_LDO4 C4_U_LDO4 C5_U_LDO4 JP1_U_LDO4 JP2_U_LDO4 LDO1_U_LDO4 Pot1_U_LDO4 R1_U_LDO4 R2_U_LDO4
component class U_LDO3: C1_U_LDO3 C2_U_LDO3 C3_U_LDO3 C4_U_LDO3 C5_U_LDO3 JP1_U_LDO3 JP2_U_LDO3 LDO1_U_LDO3 Pot1_U_LDO3 R1_U_LDO3 R2_U_LDO3
component class U_LDO2: C1_U_LDO2 C2_U_LDO2 C3_U_LDO2 C4_U_LDO2 C5_U_LDO2 JP1_U_LDO2 JP2_U_LDO2 LDO1_U_LDO2 Pot1_U_LDO2 R1_U_LDO2 R2_U_LDO2
component class U_LDO1: C1_U_LDO1 C2_U_LDO1 C3_U_LDO1 C4_U_LDO1 C5_U_LDO1 JP1_U_LDO1 JP2_U_LDO1 LDO1_U_LDO1 Pot1_U_LDO1 R1_U_LDO1 R2_U_LDO1
component class MainSchematic: * BANANA1 BANANA2 C6 C7 C8 C9 C10 C11 C12 C13 C15 C16 C17 C18 EndLaunch_SW3 JP3 JP4 JP5 JP6 JP7 JP8 JP9 Pot2 Pot3 Pot4 Pot5 Pot6 R3 R4 R5 R6 R7 R8 R9 R10 R11 R12 R13 R14 R15 R16 SMA1 SMA2 SMA3 SMA4 SOP1 SOP2
component class U_SUPPLY_DECAP_NW1: C19_U_SUPPLY_DECAP_NW1 C20_U_SUPPLY_DECAP_NW1 C21_U_SUPPLY_DECAP_NW1 R17_U_SUPPLY_DECAP_NW1
component class U_SUPPLY_DECAP_NW2: C19_U_SUPPLY_DECAP_NW2 C20_U_SUPPLY_DECAP_NW2 C21_U_SUPPLY_DECAP_NW2 R17_U_SUPPLY_DECAP_NW2
component class U_SUPPLY_DECAP_NW3: C19_U_SUPPLY_DECAP_NW3 C20_U_SUPPLY_DECAP_NW3 C21_U_SUPPLY_DECAP_NW3 R17_U_SUPPLY_DECAP_NW3
component class U_SUPPLY_DECAP_NW4: C19_U_SUPPLY_DECAP_NW4 C20_U_SUPPLY_DECAP_NW4 C21_U_SUPPLY_DECAP_NW4 R17_U_SUPPLY_DECAP_NW4
component class U_SUPPLY_DECAP_NW5: C19_U_SUPPLY_DECAP_NW5 C20_U_SUPPLY_DECAP_NW5 C21_U_SUPPLY_DECAP_NW5 R17_U_SUPPLY_DECAP_NW5
component class U_SUPPLY_DECAP_NW6: C19_U_SUPPLY_DECAP_NW6 C20_U_SUPPLY_DECAP_NW6 C21_U_SUPPLY_DECAP_NW6 R17_U_SUPPLY_DECAP_NW6
component class U_SUPPLY_DECAP_NW7: C19_U_SUPPLY_DECAP_NW7 C20_U_SUPPLY_DECAP_NW7 C21_U_SUPPLY_DECAP_NW7 R17_U_SUPPLY_DECAP_NW7
component class U_SUPPLY_DECAP_NW8: C19_U_SUPPLY_DECAP_NW8 C20_U_SUPPLY_DECAP_NW8 C21_U_SUPPLY_DECAP_NW8 R17_U_SUPPLY_DECAP_NW8
component class U_SUPPLY_DECAP_NW9: C19_U_SUPPLY_DECAP_NW9 C20_U_SUPPLY_DECAP_NW9 C21_U_SUPPLY_DECAP_NW9 R17_U_SUPPLY_DECAP_NW9
component class U_SUPPLY_DECAP_NW10: C19_U_SUPPLY_DECAP_NW10 C20_U_SUPPLY_DECAP_NW10 C21_U_SUPPLY_DECAP_NW10 R17_U_SUPPLY_DECAP_NW10
channel class SUPPLY_DECAP_NW: U_SUPPLY_DECAP_NW1 U_SUPPLY_DECAP_NW2 U_SUPPLY_DECAP_NW3 U_SUPPLY_DECAP_NW4 U_SUPPLY_DECAP_NW5 U_SUPPLY_DECAP_NW6 U_SUPPLY_DECAP_NW7 U_SUPPLY_DECAP_NW8 U_SUPPLY_DECAP_NW9 U_SUPPLY_DECAP_NW10

## Components (designator, comment, footprint, x,y, rotation, side; value= is the part's Value field where it differs from the comment)
* "Component_1" PCBComponent_1 1719,6311 r0 top
BANANA1 "BANANA_CONN" BANANA_CONN 4665,140 r90 top
BANANA2 "BANANA_CONN" BANANA_CONN 5226,140 r90 top
C1_U_LDO1 "10nF" Capacitor 3069,1930 r270 top (schematic designator C1)
C1_U_LDO2 "10nF" Capacitor 3989,1930 r270 top (schematic designator C1)
C1_U_LDO3 "10nF" Capacitor 4909,1930 r270 top (schematic designator C1)
C1_U_LDO4 "10nF" Capacitor 5829,1930 r270 top (schematic designator C1)
C1_U_LDO5 "10nF" Capacitor 6749,1930 r270 top (schematic designator C1)
C1_U_LDO6 "10nF" Capacitor 3069,2861 r270 top (schematic designator C1)
C1_U_LDO7 "10nF" Capacitor 3989,2861 r270 top (schematic designator C1)
C1_U_LDO8 "10nF" Capacitor 4909,2861 r270 top (schematic designator C1)
C1_U_LDO9 "10nF" Capacitor 5829,2861 r270 top (schematic designator C1)
C1_U_LDO10 "10nF" Capacitor 6749,2861 r270 top (schematic designator C1)
C1_U_LDO11 "10nF" Capacitor 3069,3792 r270 top (schematic designator C1)
C1_U_LDO12 "10nF" Capacitor 3989,3792 r270 top (schematic designator C1)
C1_U_LDO13 "10nF" Capacitor 4909,3792 r270 top (schematic designator C1)
C2_U_LDO1 "10uF" Capacitor 3691,1915 r90 top (schematic designator C2)
C2_U_LDO2 "10uF" Capacitor 4611,1915 r90 top (schematic designator C2)
C2_U_LDO3 "10uF" Capacitor 5531,1915 r90 top (schematic designator C2)
C2_U_LDO4 "10uF" Capacitor 6451,1915 r90 top (schematic designator C2)
C2_U_LDO5 "10uF" Capacitor 7371,1915 r90 top (schematic designator C2)
C2_U_LDO6 "10uF" Capacitor 3691,2846 r90 top (schematic designator C2)
C2_U_LDO7 "10uF" Capacitor 4611,2846 r90 top (schematic designator C2)
C2_U_LDO8 "10uF" Capacitor 5531,2846 r90 top (schematic designator C2)
C2_U_LDO9 "10uF" Capacitor 6451,2846 r90 top (schematic designator C2)
C2_U_LDO10 "10uF" Capacitor 7371,2846 r90 top (schematic designator C2)
C2_U_LDO11 "10uF" Capacitor 3691,3777 r90 top (schematic designator C2)
C2_U_LDO12 "10uF" Capacitor 4611,3777 r90 top (schematic designator C2)
C2_U_LDO13 "10uF" Capacitor 5531,3777 r90 top (schematic designator C2)
C3_U_LDO1 "10nF" Capacitor 3211,2104 r180 top (schematic designator C3)
C3_U_LDO2 "10nF" Capacitor 4131,2104 r180 top (schematic designator C3)
C3_U_LDO3 "10nF" Capacitor 5051,2104 r180 top (schematic designator C3)
C3_U_LDO4 "10nF" Capacitor 5971,2104 r180 top (schematic designator C3)
C3_U_LDO5 "10nF" Capacitor 6891,2104 r180 top (schematic designator C3)
C3_U_LDO6 "10nF" Capacitor 3211,3035 r180 top (schematic designator C3)
C3_U_LDO7 "10nF" Capacitor 4131,3035 r180 top (schematic designator C3)
C3_U_LDO8 "10nF" Capacitor 5051,3035 r180 top (schematic designator C3)
C3_U_LDO9 "10nF" Capacitor 5971,3035 r180 top (schematic designator C3)
C3_U_LDO10 "10nF" Capacitor 6891,3035 r180 top (schematic designator C3)
C3_U_LDO11 "10nF" Capacitor 3211,3966 r180 top (schematic designator C3)
C3_U_LDO12 "10nF" Capacitor 4131,3966 r180 top (schematic designator C3)
C3_U_LDO13 "10nF" Capacitor 5051,3966 r180 top (schematic designator C3)
C4_U_LDO1 "10uF" Capacitor 3589,1912 r270 top (schematic designator C4)
C4_U_LDO2 "10uF" Capacitor 4509,1912 r270 top (schematic designator C4)
C4_U_LDO3 "10uF" Capacitor 5429,1912 r270 top (schematic designator C4)
C4_U_LDO4 "10uF" Capacitor 6349,1912 r270 top (schematic designator C4)
C4_U_LDO5 "10uF" Capacitor 7269,1912 r270 top (schematic designator C4)
C4_U_LDO6 "10uF" Capacitor 3589,2843 r270 top (schematic designator C4)
C4_U_LDO7 "10uF" Capacitor 4509,2843 r270 top (schematic designator C4)
C4_U_LDO8 "10uF" Capacitor 5429,2843 r270 top (schematic designator C4)
C4_U_LDO9 "10uF" Capacitor 6349,2843 r270 top (schematic designator C4)
C4_U_LDO10 "10uF" Capacitor 7269,2843 r270 top (schematic designator C4)
C4_U_LDO11 "10uF" Capacitor 3589,3774 r270 top (schematic designator C4)
C4_U_LDO12 "10uF" Capacitor 4509,3774 r270 top (schematic designator C4)
C4_U_LDO13 "10uF" Capacitor 5429,3774 r270 top (schematic designator C4)
C5_U_LDO1 "10uF" Capacitor 3212,1513 r180 top (schematic designator C5)
C5_U_LDO2 "10uF" Capacitor 4132,1513 r180 top (schematic designator C5)
C5_U_LDO3 "10uF" Capacitor 5052,1513 r180 top (schematic designator C5)
C5_U_LDO4 "10uF" Capacitor 5972,1513 r180 top (schematic designator C5)
C5_U_LDO5 "10uF" Capacitor 6892,1513 r180 top (schematic designator C5)
C5_U_LDO6 "10uF" Capacitor 3212,2444 r180 top (schematic designator C5)
C5_U_LDO7 "10uF" Capacitor 4132,2444 r180 top (schematic designator C5)
C5_U_LDO8 "10uF" Capacitor 5052,2444 r180 top (schematic designator C5)
C5_U_LDO9 "10uF" Capacitor 5972,2444 r180 top (schematic designator C5)
C5_U_LDO10 "10uF" Capacitor 6892,2444 r180 top (schematic designator C5)
C5_U_LDO11 "10uF" Capacitor 3212,3375 r180 top (schematic designator C5)
C5_U_LDO12 "10uF" Capacitor 4132,3375 r180 top (schematic designator C5)
C5_U_LDO13 "10uF" Capacitor 5052,3375 r180 top (schematic designator C5)
C6 "10uF" Capacitor 4069,844 r0 top
C7 "10uF" Capacitor 4279,844 r0 top
C8 "cap" Capacitor 7355,344 r0 top
C9 "cap" Capacitor 7599,1246 r0 top
C10 "10uF" Capacitor 7169,1246 r0 top
C11 "10uF" Capacitor 7389,1246 r0 top
C12 "cap" Capacitor 6119,1246 r0 top
C13 "cap" Capacitor 5068,1246 r0 top
C15 "cap" Capacitor 3798,1246 r0 top
C16 "1uF" Capacitor 294,1246 r0 top
C17 "1uF" Capacitor 515,1246 r0 top
C18 "1uF" Capacitor 735,1246 r0 top
C19_U_SUPPLY_DECAP_NW1 "cap" Capacitor 5957,3245 r180 bottom (schematic designator C19)
C19_U_SUPPLY_DECAP_NW2 "cap" Capacitor 6709,3245 r180 bottom (schematic designator C19)
C19_U_SUPPLY_DECAP_NW3 "cap" Capacitor 1257,5932 r0 bottom (schematic designator C19)
C19_U_SUPPLY_DECAP_NW4 "cap" Capacitor 2673,6677 r0 bottom (schematic designator C19)
C19_U_SUPPLY_DECAP_NW5 "cap" Capacitor 2710,6464 r0 bottom (schematic designator C19)
C19_U_SUPPLY_DECAP_NW6 "cap" Capacitor 1696,5577 r270 bottom (schematic designator C19)
C19_U_SUPPLY_DECAP_NW7 "cap" Capacitor 1959,5672 r270 bottom (schematic designator C19)
C19_U_SUPPLY_DECAP_NW8 "cap" Capacitor 828,6159 r180 bottom (schematic designator C19)
C19_U_SUPPLY_DECAP_NW9 "cap" Capacitor 822,6363 r180 bottom (schematic designator C19)
C19_U_SUPPLY_DECAP_NW10 "cap" Capacitor 852,6612 r180 bottom (schematic designator C19)
C20_U_SUPPLY_DECAP_NW1 "cap" Capacitor 6130,3246 r0 bottom (schematic designator C20)
C20_U_SUPPLY_DECAP_NW2 "cap" Capacitor 6882,3246 r0 bottom (schematic designator C20)
C20_U_SUPPLY_DECAP_NW3 "cap" Capacitor 1084,5931 r180 bottom (schematic designator C20)
C20_U_SUPPLY_DECAP_NW4 "cap" Capacitor 2500,6676 r180 bottom (schematic designator C20)
C20_U_SUPPLY_DECAP_NW5 "cap" Capacitor 2537,6463 r180 bottom (schematic designator C20)
C20_U_SUPPLY_DECAP_NW6 "cap" Capacitor 1695,5750 r90 bottom (schematic designator C20)
C20_U_SUPPLY_DECAP_NW7 "cap" Capacitor 1958,5845 r90 bottom (schematic designator C20)
C20_U_SUPPLY_DECAP_NW8 "cap" Capacitor 1001,6160 r0 bottom (schematic designator C20)
C20_U_SUPPLY_DECAP_NW9 "cap" Capacitor 995,6364 r0 bottom (schematic designator C20)
C20_U_SUPPLY_DECAP_NW10 "cap" Capacitor 1025,6613 r0 bottom (schematic designator C20)
C21_U_SUPPLY_DECAP_NW1 "cap" Capacitor 5957,3245 r180 top (schematic designator C21)
C21_U_SUPPLY_DECAP_NW2 "cap" Capacitor 6709,3245 r180 top (schematic designator C21)
C21_U_SUPPLY_DECAP_NW3 "cap" Capacitor 1257,5932 r0 top (schematic designator C21)
C21_U_SUPPLY_DECAP_NW4 "cap" Capacitor 2673,6677 r0 top (schematic designator C21)
C21_U_SUPPLY_DECAP_NW5 "cap" Capacitor 2710,6464 r0 top (schematic designator C21)
C21_U_SUPPLY_DECAP_NW6 "cap" Capacitor 1696,5577 r270 top (schematic designator C21)
C21_U_SUPPLY_DECAP_NW7 "cap" Capacitor 1959,5672 r270 top (schematic designator C21)
C21_U_SUPPLY_DECAP_NW8 "cap" Capacitor 828,6159 r180 top (schematic designator C21)
C21_U_SUPPLY_DECAP_NW9 "cap" Capacitor 822,6363 r180 top (schematic designator C21)
C21_U_SUPPLY_DECAP_NW10 "cap" Capacitor 852,6612 r180 top (schematic designator C21)
JP1_U_LDO1 "JP2" JUMPER2 3366,1518 r90 top (schematic designator JP1)
JP1_U_LDO2 "JP2" JUMPER2 4286,1518 r90 top (schematic designator JP1)
JP1_U_LDO3 "JP2" JUMPER2 5206,1518 r90 top (schematic designator JP1)
JP1_U_LDO4 "JP2" JUMPER2 6126,1518 r90 top (schematic designator JP1)
JP1_U_LDO5 "JP2" JUMPER2 7046,1518 r90 top (schematic designator JP1)
JP1_U_LDO6 "JP2" JUMPER2 3366,2449 r90 top (schematic designator JP1)
JP1_U_LDO7 "JP2" JUMPER2 4286,2449 r90 top (schematic designator JP1)
JP1_U_LDO8 "JP2" JUMPER2 5206,2449 r90 top (schematic designator JP1)
JP1_U_LDO9 "JP2" JUMPER2 6126,2449 r90 top (schematic designator JP1)
JP1_U_LDO10 "JP2" JUMPER2 7046,2449 r90 top (schematic designator JP1)
JP1_U_LDO11 "JP2" JUMPER2 3366,3380 r90 top (schematic designator JP1)
JP1_U_LDO12 "JP2" JUMPER2 4286,3380 r90 top (schematic designator JP1)
JP1_U_LDO13 "JP2" JUMPER2 5206,3380 r90 top (schematic designator JP1)
JP2_U_LDO1 "JP2" JUMPER2 3694,1746 r0 top (schematic designator JP2)
JP2_U_LDO2 "JP2" JUMPER2 4614,1746 r0 top (schematic designator JP2)
JP2_U_LDO3 "JP2" JUMPER2 5534,1746 r0 top (schematic designator JP2)
JP2_U_LDO4 "JP2" JUMPER2 6454,1746 r0 top (schematic designator JP2)
JP2_U_LDO5 "JP2" JUMPER2 7374,1746 r0 top (schematic designator JP2)
JP2_U_LDO6 "JP2" JUMPER2 3694,2677 r0 top (schematic designator JP2)
JP2_U_LDO7 "JP2" JUMPER2 4614,2677 r0 top (schematic designator JP2)
JP2_U_LDO8 "JP2" JUMPER2 5534,2677 r0 top (schematic designator JP2)
JP2_U_LDO9 "JP2" JUMPER2 6454,2677 r0 top (schematic designator JP2)
JP2_U_LDO10 "JP2" JUMPER2 7374,2677 r0 top (schematic designator JP2)
JP2_U_LDO11 "JP2" JUMPER2 3694,3608 r0 top (schematic designator JP2)